# Altium PCB MegaD-328_7I7O_board.PcbDoc
Units mm, origin at the board's own origin, x right, y up, seen from the top; angles counter-clockwise.
Board outline 102.5 x 86.6 mm, 2 copper layers (Top Layer, Bottom Layer); 94 components, 73 nets, 255 pads, 0 vias.
Unrouted connection lines stored in the file: 181.
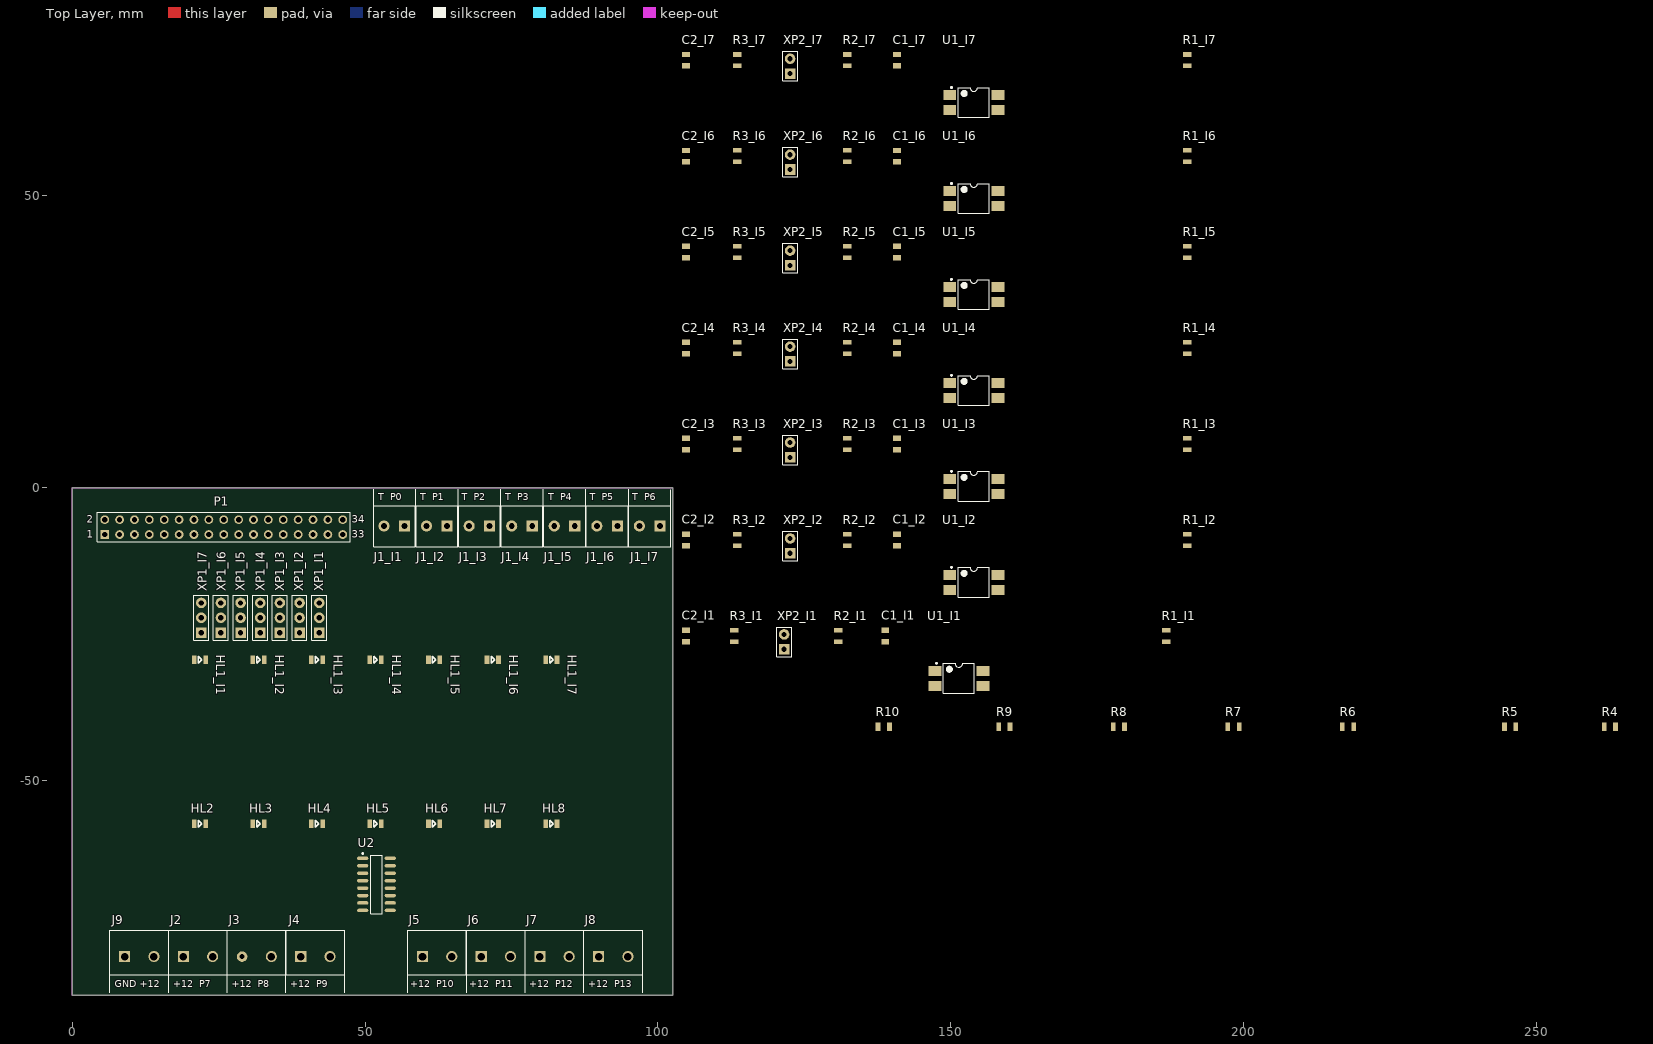
[diagram p0: Top Layer view]
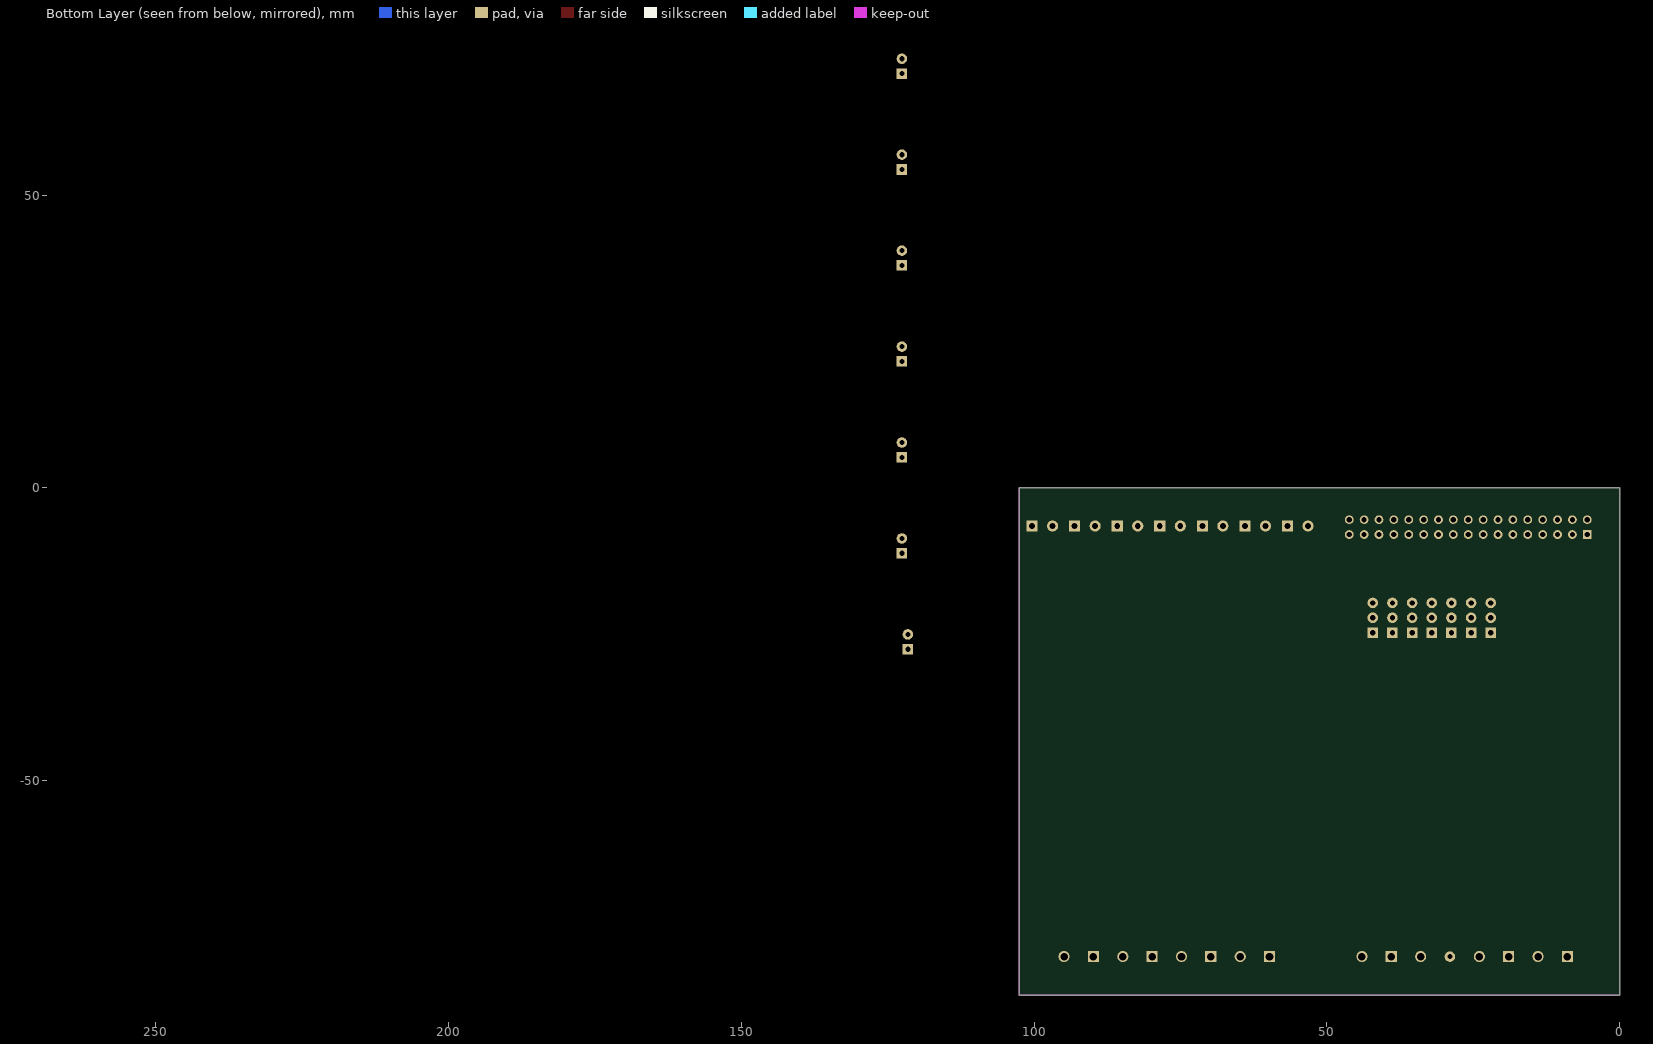
[diagram p1: Bottom Layer view, seen from below]

## Layer stack, top to bottom
Top Solder: solder mask 0.0102, Solder Resist, Dk 3.5
Top Layer: signal copper 0.0356
Dielectric 1: dielectric 0.32, FR-4, Dk 4.8
Bottom Layer: signal copper 0.0356
Bottom Solder: solder mask 0.0102, Solder Resist, Dk 3.5

## Board outline
0,-86.6 102.5,-86.6 102.5,0 0,0

## Design rules (kind name [scope] priority, off if disabled: settings)
Clearance [All] p1: gap=0.254 ignorepadtopadclearanceinfootprint=FALSE except(0: Arc-Hole Track-Hole SMDPad-Hole THPad-Hole Via-Hole Fill-Hole Poly-Hole Region-Hole Text-Hole)
PolygonConnect [All] p1: connectstyle=Relief reliefconductorwidth=0.254 reliefentries=4 polygonreliefangle="90 Angle" airgapwidth=0.254
RoutingVias [All] p1: holewidth=0.711 width=1.27 viastyle="Through Hole" minholewidth=0.711 minwidth=1.27 maxholewidth=0.711 maxwidth=1.27
SolderMaskExpansion [All] p1: expansion=0.102
Width [All] p1: maxlimit=0.254 minlimit=0.254 preferedwidth=0.254
30 further rules are at their usual default settings.

## Classes and differential pairs
channel class Input_chanel: I1 I2 I3 I4 I5 I6 I7
net class I[1..7]: I1 I2 I3 I4 I5 I6 I7
component class MegaD-328_7I7O_Shematic: HL2 HL3 HL4 HL5 HL6 HL7 HL8 J2 J3 J4 J5 J6 J7 J8 J9 P1 R4 R5 R6 R7 R8 R9 R10 U2
component class I7: C1_I7 C2_I7 HL1_I7 J1_I7 R1_I7 R2_I7 R3_I7 U1_I7 XP1_I7 XP2_I7
component class I6: C1_I6 C2_I6 HL1_I6 J1_I6 R1_I6 R2_I6 R3_I6 U1_I6 XP1_I6 XP2_I6
component class I5: C1_I5 C2_I5 HL1_I5 J1_I5 R1_I5 R2_I5 R3_I5 U1_I5 XP1_I5 XP2_I5
component class I4: C1_I4 C2_I4 HL1_I4 J1_I4 R1_I4 R2_I4 R3_I4 U1_I4 XP1_I4 XP2_I4
component class I3: C1_I3 C2_I3 HL1_I3 J1_I3 R1_I3 R2_I3 R3_I3 U1_I3 XP1_I3 XP2_I3
component class I2: C1_I2 C2_I2 HL1_I2 J1_I2 R1_I2 R2_I2 R3_I2 U1_I2 XP1_I2 XP2_I2
component class I1: C1_I1 C2_I1 HL1_I1 J1_I1 R1_I1 R2_I1 R3_I1 U1_I1 XP1_I1 XP2_I1

## Components (designator, comment, footprint, x,y, rotation, side; value= is the part's Value field where it differs from the comment)
C1_I1 "CAP_SMD" CAP0805 138.811,-25.259 r90 top (schematic designator C1)
C1_I2 "CAP_SMD" CAP0805 140.843,-8.876 r90 top (schematic designator C1)
C1_I3 "CAP_SMD" CAP0805 140.843,7.507 r90 top (schematic designator C1)
C1_I4 "CAP_SMD" CAP0805 140.843,23.89 r90 top (schematic designator C1)
C1_I5 "CAP_SMD" CAP0805 140.843,40.273 r90 top (schematic designator C1)
C1_I6 "CAP_SMD" CAP0805 140.843,56.656 r90 top (schematic designator C1)
C1_I7 "CAP_SMD" CAP0805 140.843,73.039 r90 top (schematic designator C1)
C2_I1 "CAP_SMD" CAP0805 104.775,-25.259 r90 top (schematic designator C2)
C2_I2 "CAP_SMD" CAP0805 104.775,-8.876 r90 top (schematic designator C2)
C2_I3 "CAP_SMD" CAP0805 104.775,7.507 r90 top (schematic designator C2)
C2_I4 "CAP_SMD" CAP0805 104.775,23.89 r90 top (schematic designator C2)
C2_I5 "CAP_SMD" CAP0805 104.775,40.273 r90 top (schematic designator C2)
C2_I6 "CAP_SMD" CAP0805 104.775,56.656 r90 top (schematic designator C2)
C2_I7 "CAP_SMD" CAP0805 104.775,73.039 r90 top (schematic designator C2)
HL1_I1 "LED_SMD" 0805_LED 21.8,-29.325 r0 top (schematic designator HL1)
HL1_I2 "LED_SMD" 0805_LED 31.8,-29.325 r0 top (schematic designator HL1)
HL1_I3 "LED_SMD" 0805_LED 41.8,-29.325 r0 top (schematic designator HL1)
HL1_I4 "LED_SMD" 0805_LED 51.8,-29.325 r0 top (schematic designator HL1)
HL1_I5 "LED_SMD" 0805_LED 61.8,-29.325 r0 top (schematic designator HL1)
HL1_I6 "LED_SMD" 0805_LED 71.8,-29.325 r0 top (schematic designator HL1)
HL1_I7 "LED_SMD" 0805_LED 81.8,-29.325 r0 top (schematic designator HL1)
HL2 "LED_SMD" 0805_LED 21.8,-57.325 r0 top
HL3 "LED_SMD" 0805_LED 31.8,-57.325 r0 top
HL4 "LED_SMD" 0805_LED 41.8,-57.325 r0 top
HL5 "LED_SMD" 0805_LED 51.8,-57.325 r0 top
HL6 "LED_SMD" 0805_LED 61.8,-57.325 r0 top
HL7 "LED_SMD" 0805_LED 71.8,-57.325 r0 top
HL8 "LED_SMD" 0805_LED 81.8,-57.325 r0 top
J1_I1 "KF120-02P-14" KF350-3.5-02P 56.735,-6.493 r180 top (schematic designator J1)
J1_I2 "KF120-02P-14" KF350-3.5-02P 64.001,-6.493 r180 top (schematic designator J1)
J1_I3 "KF120-02P-14" KF350-3.5-02P 71.267,-6.493 r180 top (schematic designator J1)
J1_I4 "KF120-02P-14" KF350-3.5-02P 78.533,-6.493 r180 top (schematic designator J1)
J1_I5 "KF120-02P-14" KF350-3.5-02P 85.799,-6.493 r180 top (schematic designator J1)
J1_I6 "KF120-02P-14" KF350-3.5-02P 93.065,-6.493 r180 top (schematic designator J1)
J1_I7 "KF120-02P-14" KF350-3.5-02P 100.331,-6.493 r180 top (schematic designator J1)
J2 "" DG301-5.0-02P-1X#1 18.975,-80 r0 top
J3 "" DG301-5.0-02P-1X#2 29,-80 r0 top
J4 "" DG301-5.0-02P-1X#1 39.025,-80 r0 top
J5 "" DG301-5.0-02P-1X#1 59.8,-80 r0 top
J6 "" DG301-5.0-02P-1X#1 69.825,-80 r0 top
J7 "" DG301-5.0-02P-1X#1 79.85,-80 r0 top
J8 "" DG301-5.0-02P-1X#1 89.875,-80 r0 top
J9 "" DG301-5.0-02P-1X#1 8.953,-80 r0 top
P1 "" HDR2X17-PLC 5.553,-7.95 r0 top
R1_I1 "RES_SMD" RES0805 186.817,-25.259 r90 top (schematic designator R1)
R1_I2 "RES_SMD" RES0805 190.373,-8.876 r90 top (schematic designator R1)
R1_I3 "RES_SMD" RES0805 190.373,7.507 r90 top (schematic designator R1)
R1_I4 "RES_SMD" RES0805 190.373,23.89 r90 top (schematic designator R1)
R1_I5 "RES_SMD" RES0805 190.373,40.273 r90 top (schematic designator R1)
R1_I6 "RES_SMD" RES0805 190.373,56.656 r90 top (schematic designator R1)
R1_I7 "RES_SMD" RES0805 190.373,73.039 r90 top (schematic designator R1)
R2_I1 "RES_SMD" RES0805 130.81,-25.259 r90 top (schematic designator R2)
R2_I2 "RES_SMD" RES0805 132.334,-8.876 r90 top (schematic designator R2)
R2_I3 "RES_SMD" RES0805 132.334,7.507 r90 top (schematic designator R2)
R2_I4 "RES_SMD" RES0805 132.334,23.89 r90 top (schematic designator R2)
R2_I5 "RES_SMD" RES0805 132.334,40.273 r90 top (schematic designator R2)
R2_I6 "RES_SMD" RES0805 132.334,56.656 r90 top (schematic designator R2)
R2_I7 "RES_SMD" RES0805 132.334,73.039 r90 top (schematic designator R2)
R3_I1 "RES_SMD" RES0805 113.03,-25.259 r90 top (schematic designator R3)
R3_I2 "RES_SMD" RES0805 113.538,-8.876 r90 top (schematic designator R3)
R3_I3 "RES_SMD" RES0805 113.538,7.507 r90 top (schematic designator R3)
R3_I4 "RES_SMD" RES0805 113.538,23.89 r90 top (schematic designator R3)
R3_I5 "RES_SMD" RES0805 113.538,40.273 r90 top (schematic designator R3)
R3_I6 "RES_SMD" RES0805 113.538,56.656 r90 top (schematic designator R3)
R3_I7 "RES_SMD" RES0805 113.538,73.039 r90 top (schematic designator R3)
R4 "RES_SMD" RES0805 262.509,-40.753 r0 top
R5 "RES_SMD" RES0805 245.491,-40.753 r0 top
R6 "RES_SMD" RES0805 217.805,-40.753 r0 top
R7 "RES_SMD" RES0805 198.247,-40.753 r0 top
R8 "RES_SMD" RES0805 178.689,-40.753 r0 top
R9 "RES_SMD" RES0805 159.131,-40.753 r0 top
R10 "RES_SMD" RES0805 138.557,-40.753 r0 top
U1_I1 "PC817" "DIP-4 - SMT" 151.384,-32.498 r0 top (schematic designator U1)
U1_I2 "PC817" "DIP-4 - SMT" 153.924,-16.115 r0 top (schematic designator U1)
U1_I3 "PC817" "DIP-4 - SMT" 153.924,0.268 r0 top (schematic designator U1)
U1_I4 "PC817" "DIP-4 - SMT" 153.924,16.651 r0 top (schematic designator U1)
U1_I5 "PC817" "DIP-4 - SMT" 153.924,33.034 r0 top (schematic designator U1)
U1_I6 "PC817" "DIP-4 - SMT" 153.924,49.417 r0 top (schematic designator U1)
U1_I7 "PC817" "DIP-4 - SMT" 153.924,65.8 r0 top (schematic designator U1)
U2 "ULN2003ADR" SO-16_L 51.95,-67.675 r0 top
XP1_I1 "PLS-03" PLS-03 42.173,-24.7 r90 top (schematic designator XP1)
XP1_I2 "PLS-03" PLS-03 38.815,-24.7 r90 top (schematic designator XP1)
XP1_I3 "PLS-03" PLS-03 35.457,-24.7 r90 top (schematic designator XP1)
XP1_I4 "PLS-03" PLS-03 32.099,-24.7 r90 top (schematic designator XP1)
XP1_I5 "PLS-03" PLS-03 28.741,-24.7 r90 top (schematic designator XP1)
XP1_I6 "PLS-03" PLS-03 25.383,-24.7 r90 top (schematic designator XP1)
XP1_I7 "PLS-03" PLS-03 22.025,-24.7 r90 top (schematic designator XP1)
XP2_I1 "PLS-02" PLS-02 121.539,-27.545 r90 top (schematic designator XP2)
XP2_I2 "PLS-02" PLS-02 122.555,-11.162 r90 top (schematic designator XP2)
XP2_I3 "PLS-02" PLS-02 122.555,5.221 r90 top (schematic designator XP2)
XP2_I4 "PLS-02" PLS-02 122.555,21.604 r90 top (schematic designator XP2)
XP2_I5 "PLS-02" PLS-02 122.555,37.987 r90 top (schematic designator XP2)
XP2_I6 "PLS-02" PLS-02 122.555,54.37 r90 top (schematic designator XP2)
XP2_I7 "PLS-02" PLS-02 122.555,70.753 r90 top (schematic designator XP2)

## Footprints (in the part's own frame and the unit in brackets; to place one, negate y for a bottom-side part, rotate by r counter-clockwise, add the part's x,y. Pads: shape width x height; smd on the part's side, far side on the other; paste and mask are expansions set on the pad)
0805_LED [mm] "LED, 2-Leads, Body 2,00x1,20mm, IPC Medium Density"
  rect 0.8x1.45 smd: 1(-0.975,0) 2(0.975,0)
  silkscreen extent -0.3,-0.6 0.3,0.6, body extent -1,-0.6 1,0.6, height 0.6
CAP0805 [mm] "Chip Capacitor, 2-Leads, Body 2,00x1,20mm, IPC Medium Density"
  rect 0.9x1.35 smd: 1(-0.975,0) 2(0.975,0)
  body extent -1,-0.6 1,0.6, height 0.4
DG301-5.0-02P-1X#1 [mm]
  rect 1.9x1.9 hole 1.3 mask+0.102: 1(0,0)
  round 1.9 hole 1.3 mask+0.102: 2(5,0)
  silkscreen extent -2.5,-3.1 7.5,4.5, body extent -3.1,-3.1 7.5,4.5, height 10
DG301-5.0-02P-1X#2 [mm]
  round 1.8 hole 0.9: 1(0,0)
  round 1.9 hole 1.3 mask+0.102: 2(5,0)
  silkscreen extent -2.5,-3.1 7.5,4.5, body extent -3.1,-3.1 7.5,4.5, height 10
"DIP-4 - SMT" [mm] "DIP; 4 Leads; Row Spacing 7.62 mm; Pitch 2.54 mm"
  rect 2.2x1.7 smd: 1(-4.1,1.27) 2(-4.1,-1.27) 3(4.1,-1.27) 4(4.1,1.27)
  silkscreen extent -3.93,-2.55 2.65,2.69, body extent -3.15,8.9 -3.15,8.9, height 0.25
HDR2X17-PLC [mm] "Connector; Header; 17x2 Position"
  rect 1.5x1.5 hole 0.9: 1(0,0)
  round 1.5 hole 0.9: 2(0,2.54) 3(2.54,0) 4(2.54,2.54) 5(5.08,0) 6(5.08,2.54) 7(7.62,0) 8(7.62,2.54) 9(10.16,0) 10(10.16,2.54) 11(12.7,0) 12(12.7,2.54) 13(15.24,0) 14(15.24,2.54) 15(17.78,0) 16(17.78,2.54) 17(20.32,0) 18(20.32,2.54) 19(22.86,0) 20(22.86,2.54) 21(25.4,0) 22(25.4,2.54) 23(27.94,0) 24(27.94,2.54) 25(30.48,0) 26(30.48,2.54) 27(33.02,0) 28(33.02,2.54) 29(35.56,0) 30(35.56,2.54) 31(38.1,0) 32(38.1,2.54) 33(40.64,0) 34(40.64,2.54)
  silkscreen extent -1.27,-1.27 41.91,3.81, body extent -1.27,-1.27 41.91,3.81, height 8.6
KF350-3.5-02P [mm]
  rect 1.9x1.9 hole 1 mask+0.102: 1(0,0)
  round 1.9 hole 1 mask+0.102: 2(3.5,0)
  silkscreen extent -1.84,-3.46 5.28,3.5, body extent -1.75,-3.4 5.25,3.5, height 8.8
PLS-02 [mm]
  rect 1.8x1.8 hole 0.9: 1(0,0)
  round 1.8 hole 0.9: 2(2.54,0)
  silkscreen extent -1.27,-1.27 3.81,1.27, body extent -1.27,-1.27 3.81,1.27, height 8.6
PLS-03 [mm]
  rect 1.8x1.8 hole 0.9: 1(0,0)
  round 1.8 hole 0.9: 2(2.54,0) 3(5.08,0)
  silkscreen extent -1.27,-1.27 6.35,1.27, body extent -1.27,-1.27 6.35,1.27, height 8.6
RES0805 [mm] "Chip Resistor, 2-Leads, Body 2,00x1,20mm, IPC Medium Density"
  rect 0.8x1.45 smd: 1(-0.975,0) 2(0.975,0)
  body extent -1,-0.6 1,0.6, height 0.4
SO-16_L [mm] "SOIC, 16-Leads, Body 9.9x3.9mm, Pitch 1.27mm, IPC High Density"
  oval 1.9x0.6 smd: 1(-2.35,4.445) 2(-2.35,3.175) 3(-2.35,1.905) 4(-2.35,0.635) 5(-2.35,-0.635) 6(-2.35,-1.905) 7(-2.35,-3.175) 8(-2.35,-4.445) 9(2.35,-4.445) 10(2.35,-3.175) 11(2.35,-1.905) 12(2.35,-0.635) 13(2.35,0.635) 14(2.35,1.905) 15(2.35,3.175) 16(2.35,4.445)
  silkscreen extent -2.47,-5 1,5.42, body extent -2.95,-4.96 3.04,4.94, height 1.4

## Part data
C1_I1 C1_I2 C1_I3 C1_I4 C1_I5 C1_I6 C1_I7 C2_I1 C2_I2 C2_I3 C2_I4 C2_I5 C2_I6 C2_I7: "Ceramic capacitor, 0805", Val=100nF
HL1_I1 HL1_I2 HL1_I3 HL1_I4 HL1_I5 HL1_I6 HL1_I7 HL2 HL3 HL4 HL5 HL6 HL7 HL8: "0805 led"
J1_I1 J1_I2 J1_I3 J1_I4 J1_I5 J1_I6 J1_I7: library part Terminal_2, "Euro Terminal Block, 6 A, 150 V, -40 to 105 degC, Pitch 2.54 mm, 1x2 Position, Height 8.6 mm, Tail Length 3.3 mm", Color=Green, Contact Resistance="20 mOhm", Insulation Resistance="5000 MOhm / 1000 V", Manufacturer="Cixi KaiFeng", Rated Current="6 A", Rated Voltage="150 V", Temp. Range="-40 to 105 degC", Withstanding Voltage="AC 1500 V / 1 Min", ComponentLink1Description="Manufacturer URL", ComponentLink1URL=http://www.nb-kaifeng.com/, ComponentLink2Description=Datasheet, ComponentLink2URL=http://www.nb-kaifeng.com/upload/editor/ext_pdf/201305290533202245.pdf, Contact=Brass, Mounting Technology="Through Hole", No. of Pole=2, PackageDescription="Terminal Block, Pitch 2.54 mm, 1 x 2 Position, Height 8.6 mm, Tail Length 3.3 mm", PackageReference=KF120-2, PartNumber=KF120-02P-14, Pitch="Single Pitch"
J2 J3 J4 J5 J6 J7 J8 J9: library part Terminal_2, "Euro Terminal Block, 6 A, 150 V, -40 to 105 degC, Pitch 2.54 mm, 1x2 Position, Height 8.6 mm, Tail Length 3.3 mm", Color=Green, Contact Resistance="20 mOhm", Insulation Resistance="5000 MOhm / 1000 V", Manufacturer="Cixi KaiFeng", PartNumber=KF120-02P-14, Rated Current="6 A", Rated Voltage="150 V", Temp. Range="-40 to 105 degC", Withstanding Voltage="AC 1500 V / 1 Min", ComponentLink1Description="Manufacturer URL", ComponentLink1URL=http://www.nb-kaifeng.com/, ComponentLink2Description=Datasheet, ComponentLink2URL=http://www.nb-kaifeng.com/upload/editor/ext_pdf/201305290533202245.pdf, Contact=Brass, Mounting Technology="Through Hole", No. of Pole=2, PackageDescription="Terminal Block, Pitch 2.54 mm, 1 x 2 Position, Height 8.6 mm, Tail Length 3.3 mm", PackageReference=KF120-2, Pitch="Single Pitch"
P1: library part "Header 17X2", "Header, 17-Pin, Dual row", LatestRevisionDate=17-Jul-2002, LatestRevisionNote="Re-released for DXP Platform.", Publisher="Altium Limited"
U1_I1 U1_I2 U1_I3 U1_I4 U1_I5 U1_I6 U1_I7: "4-Pin Phototransistor Optocoupler", DatasheetVersion=Nov-2003, LatestRevisionDate=04-Mar-2005, LatestRevisionNote="Sch pins 3 & 4 Swapped.", PackageReference=DIP-4, Published=24-Mar-1999, Publisher="Altium Limited"
U2: library part ULN2003A, "High-Voltage, High-Current Darlington Transistor Array, 0.5 A, 50 V, -20 to 70 degC, 16-Pin SOIC (D), Green (RoHS & no Sb/Br), Tape and Reel", Manufacturer=TexasInstruments, Maximum Collector Emitter Saturation Voltage=1.1@100mA|1.3@200mA|1.6@350mAV, Maximum Collector Emitter Voltage=50V, Package=16SOIC, Package Description="16-Pin Plastic Small Outline, Body 9.9 x 3.9 mm, Pitch 1.27 mm", Package Reference=D16, Package Version="4040047-6/M, 06/2011", Peak DC Collector Current=0.5A, Category=DarlingtonBJT, Configuration=Array7, Datasheet URL=http://www.ti.com/general/docs/lit/getliterature.tsp?genericPartNumber=uln2003a&fileType=pdf, Datasheet Version="Rev. O, 01/2016", Manufacturer URL=http://www.ti.com/, Mounting=SurfaceMount, Package URL=http://www.ti.com/lit/ml/mpds178g/mpds178g.pdf, Packaging=Tape&Reel, Rad Hard=No, Type=NPN
R1_I1 R1_I2 R1_I3 R1_I4 R1_I5 R1_I6 R1_I7 R4 R5 R6 R7 R8 R9 R10: Val=750
R2_I1 R2_I2 R2_I3 R2_I4 R2_I5 R2_I6 R2_I7: Val=1K
R3_I1 R3_I2 R3_I3 R3_I4 R3_I5 R3_I6 R3_I7: Val=N/C

## Nets (pads, with @x,y where several pads share a name; then routed paths per layer and width w, separated by ;. In a path a pad name is that pad's centre, name@x,y a point inside that pad or via, vN(x,y) a via of type N, cw(c..) or ccw(c..) an arc to the next point about the centre after c; other vN are vias at no path point)
+3.3: P1.3 P1.4 R2_I1.1 R2_I2.1 R2_I3.1 R2_I4.1 R2_I5.1 R2_I6.1 R2_I7.1
+12: J2.1 J3.1 J4.1 J5.1 J6.1 J7.1 J8.1 J9.2 P1.1 P1.2 R1_I1.1 R1_I2.1 R1_I3.1 R1_I4.1 R1_I5.1 R1_I6.1 R1_I7.1 U2.9
GND: C1_I1.1 C1_I2.1 C1_I3.1 C1_I4.1 C1_I5.1 C1_I6.1 C1_I7.1 C2_I1.1 C2_I2.1 C2_I3.1 C2_I4.1 C2_I5.1 C2_I6.1 C2_I7.1 J1_I1.2 J1_I2.2 J1_I3.2 J1_I4.2 J1_I5.2 J1_I6.2 J1_I7.2 J9.1 P1.6 P1.8 P1.10 P1.12 P1.14 P1.16 P1.18 P1.20 P1.22 P1.24 P1.26 P1.28 P1.30 P1.32 P1.34 R3_I1.1 R3_I2.1 R3_I3.1 R3_I4.1 R3_I5.1 R3_I6.1 R3_I7.1 U1_I1.3 U1_I2.3 U1_I3.3 U1_I4.3 U1_I5.3 U1_I6.3 U1_I7.3 U2.8
I1: C2_I1.2 P1.33 R3_I1.2 XP1_I1.3 XP2_I1.1
I2: C2_I2.2 P1.31 R3_I2.2 XP1_I2.3 XP2_I2.1
I3: C2_I3.2 P1.29 R3_I3.2 XP1_I3.3 XP2_I3.1
I4: C2_I4.2 P1.27 R3_I4.2 XP1_I4.3 XP2_I4.1
I5: C2_I5.2 P1.25 R3_I5.2 XP1_I5.3 XP2_I5.1
I6: C2_I6.2 P1.23 R3_I6.2 XP1_I6.3 XP2_I6.1
I7: C2_I7.2 P1.21 R3_I7.2 XP1_I7.3 XP2_I7.1
NetC1_I1_2: C1_I1.2 U1_I1.2 XP1_I1.1
NetC1_I2_2: C1_I2.2 U1_I2.2 XP1_I2.1
NetC1_I3_2: C1_I3.2 U1_I3.2 XP1_I3.1
NetC1_I4_2: C1_I4.2 U1_I4.2 XP1_I4.1
NetC1_I5_2: C1_I5.2 U1_I5.2 XP1_I5.1
NetC1_I6_2: C1_I6.2 U1_I6.2 XP1_I6.1
NetC1_I7_2: C1_I7.2 U1_I7.2 XP1_I7.1
NetHL1_I1_1: HL1_I1.1 R1_I1.2
NetHL1_I1_2: HL1_I1.2 U1_I1.1
NetHL1_I2_1: HL1_I2.1 R1_I2.2
NetHL1_I2_2: HL1_I2.2 U1_I2.1
NetHL1_I3_1: HL1_I3.1 R1_I3.2
NetHL1_I3_2: HL1_I3.2 U1_I3.1
NetHL1_I4_1: HL1_I4.1 R1_I4.2
NetHL1_I4_2: HL1_I4.2 U1_I4.1
NetHL1_I5_1: HL1_I5.1 R1_I5.2
NetHL1_I5_2: HL1_I5.2 U1_I5.1
NetHL1_I6_1: HL1_I6.1 R1_I6.2
NetHL1_I6_2: HL1_I6.2 U1_I6.1
NetHL1_I7_1: HL1_I7.1 R1_I7.2
NetHL1_I7_2: HL1_I7.2 U1_I7.1
NetHL2_1: HL2.1 R4.2
NetHL2_2: HL2.2 U2.1
NetHL3_1: HL3.1 R5.2
NetHL3_2: HL3.2 U2.2
NetHL4_1: HL4.1 R6.2
NetHL4_2: HL4.2 U2.3
NetHL5_1: HL5.1 R7.2
NetHL5_2: HL5.2 U2.4
NetHL6_1: HL6.1 R8.2
NetHL6_2: HL6.2 U2.5
NetHL7_1: HL7.1 R9.2
NetHL7_2: HL7.2 U2.6
NetHL8_1: HL8.1 R10.2
NetHL8_2: HL8.2 U2.7
NetJ1_I1_1: J1_I1.1 XP1_I1.2
NetJ1_I2_1: J1_I2.1 XP1_I2.2
NetJ1_I3_1: J1_I3.1 XP1_I3.2
NetJ1_I4_1: J1_I4.1 XP1_I4.2
NetJ1_I5_1: J1_I5.1 XP1_I5.2
NetJ1_I6_1: J1_I6.1 XP1_I6.2
NetJ1_I7_1: J1_I7.1 XP1_I7.2
NetJ2_2: J2.2 U2.16
NetJ3_2: J3.2 U2.15
NetJ4_2: J4.2 U2.14
NetJ5_2: J5.2 U2.13
NetJ6_2: J6.2 U2.12
NetJ7_2: J7.2 U2.11
NetJ8_2: J8.2 U2.10
NetR2_I1_2: R2_I1.2 U1_I1.4 XP2_I1.2
NetR2_I2_2: R2_I2.2 U1_I2.4 XP2_I2.2
NetR2_I3_2: R2_I3.2 U1_I3.4 XP2_I3.2
NetR2_I4_2: R2_I4.2 U1_I4.4 XP2_I4.2
NetR2_I5_2: R2_I5.2 U1_I5.4 XP2_I5.2
NetR2_I6_2: R2_I6.2 U1_I6.4 XP2_I6.2
NetR2_I7_2: R2_I7.2 U1_I7.4 XP2_I7.2
P7: P1.7 R4.1
P8: P1.9 R5.1
P9: P1.11 R6.1
P10: P1.13 R7.1
P11: P1.15 R8.1
P12: P1.17 R9.1
P13: P1.19 R10.1
pads on no net: P1.5

## Keep-outs
Keep-Out Layer:
  lines w0.1: 0,-86.6 0,0.05 102.5,0.05 102.5,-86.6 0,-86.6

## Silkscreen, mask and mechanical layers (free items; w line width, h text height)
Top Overlay:
  lines w0.2: 6.45,-86.175 6.45,-83.1 ; 16.45,-86.175 16.45,-83.175 ; 26.475,-86.175 26.475,-82.975 ; 36.5,-86.175 36.5,-83.2 ; 46.525,-86.175 46.525,-83.05 ; 51.45,-3.275 51.45,-0.25 ; 57.3,-86.175 57.3,-83.15 ; 58.65,-3.275 58.65,-0.25 ; 65.9,-3.275 65.9,-0.25 ; 67.325,-86.175 67.325,-83.2 ; 73.175,-3.275 73.175,-0.25 ; 77.325,-86.175 77.325,-83.225 ; 80.45,-3.275 80.45,-0.25 ; 87.375,-86.175 87.375,-83.175 ; 87.7,-3.275 87.7,-0.25 ; 94.975,-3.275 94.975,-0.25 ; 97.375,-86.175 97.375,-83.125 ; 102.17,-3.3 102.17,-0.275
  text "T  P0" at 52.25,-2.125 h1.2
  text "T  P1" at 59.4,-2.125 h1.2
  text "T  P2" at 66.538,-2.125 h1.2
  text "T  P3" at 73.941,-2.125 h1.2
  text "T  P4" at 81.262,-2.125 h1.2
  text "T  P5" at 88.359,-2.125 h1.2
  text "T  P6" at 95.654,-2.125 h1.2
  text "GND +12" at 7.25,-85.25 h1.2
  text "+12  P7" at 17.25,-85.25 h1.2
  text "+12  P8" at 27.25,-85.25 h1.2
  text "+12  P9" at 37.25,-85.25 h1.2
  text "+12  P10" at 57.75,-85.25 h1.2
  text "+12  P11" at 67.767,-85.25 h1.2
  text "+12  P12" at 78,-85.25 h1.2
  text "+12  P13" at 88.065,-85.25 h1.2

## Text inside footprints (layer, text, board x,y; h text height)
P1: Top Overlay "2" at 2.505,-5.918 h1.27; Top Overlay "1" at 2.505,-8.458 h1.27; Top Overlay "33" at 47.717,-8.458 h1.27; Top Overlay "34" at 47.717,-5.918 h1.27